# Altium PCB ACAMP.PcbDoc
Units mil, origin at the board's own origin, x right, y up, seen from the top; angles counter-clockwise.
Board outline 1968.5 x 1968.5 mil, 4 copper layers (Top Layer, Internal Plane 1, Signal Layer 1, Bottom Layer), stack 64.634 mil thick; 81 components, 107 nets, 352 pads, 9 vias.
Unrouted connection lines stored in the file: 184.
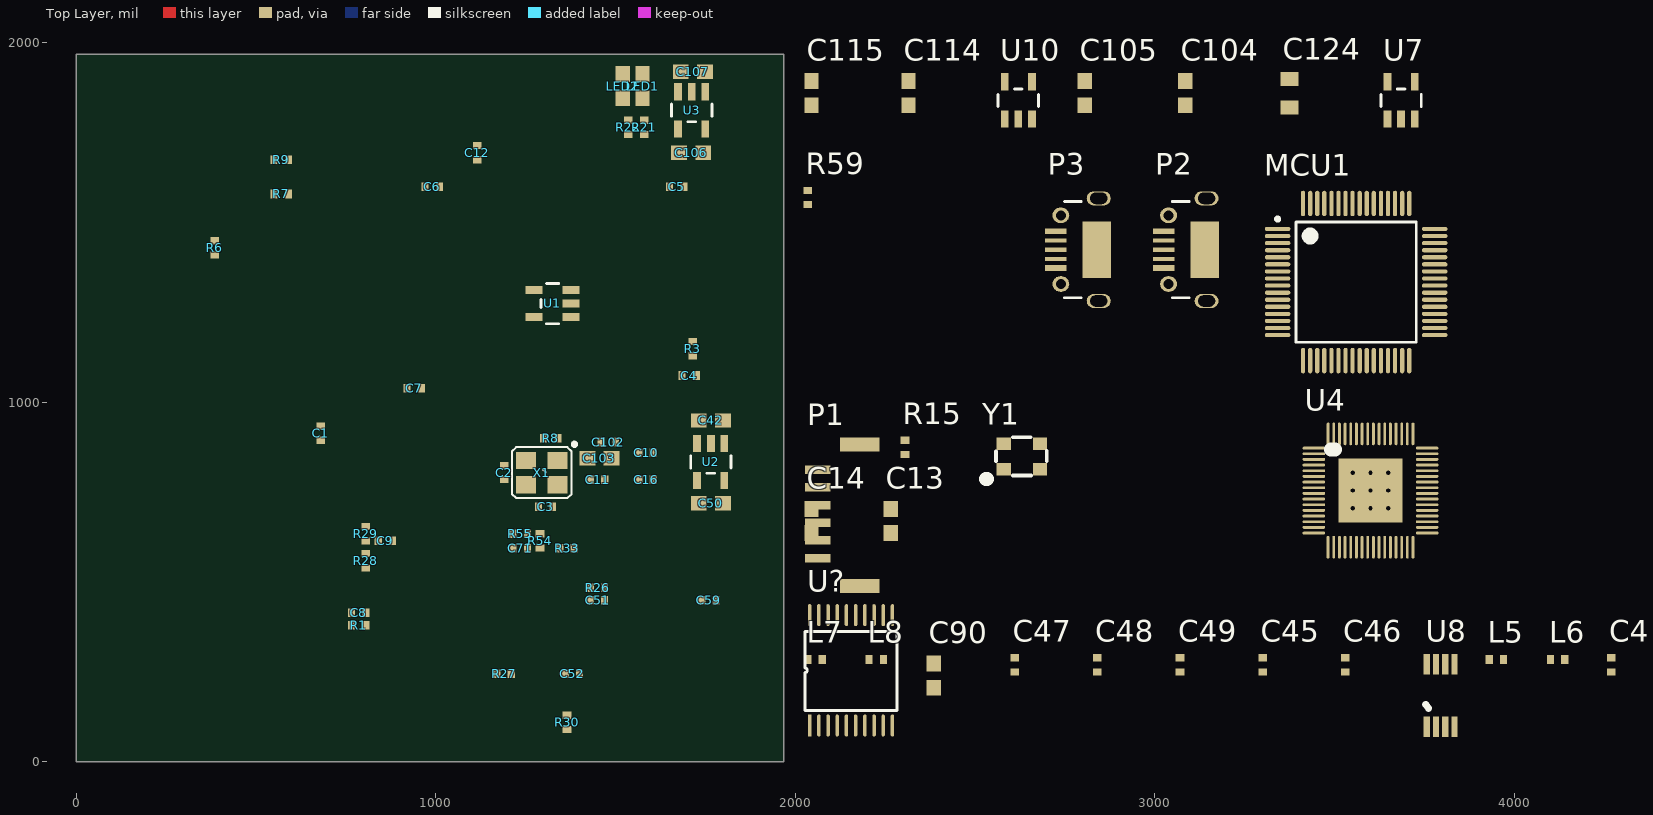
[diagram p0: Top Layer view]
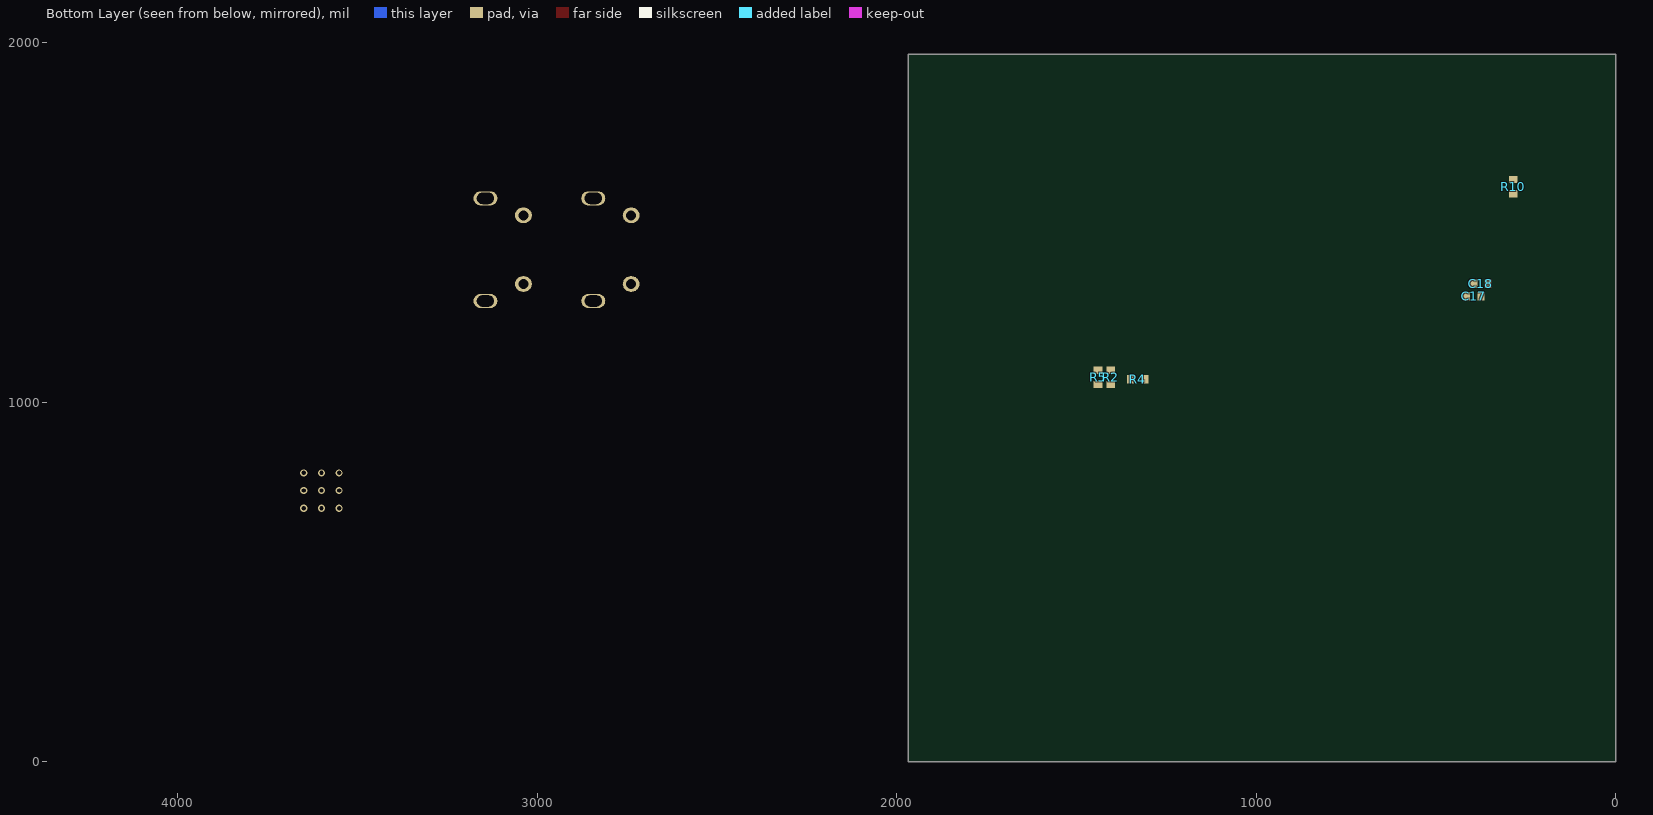
[diagram p1: Bottom Layer view, seen from below]
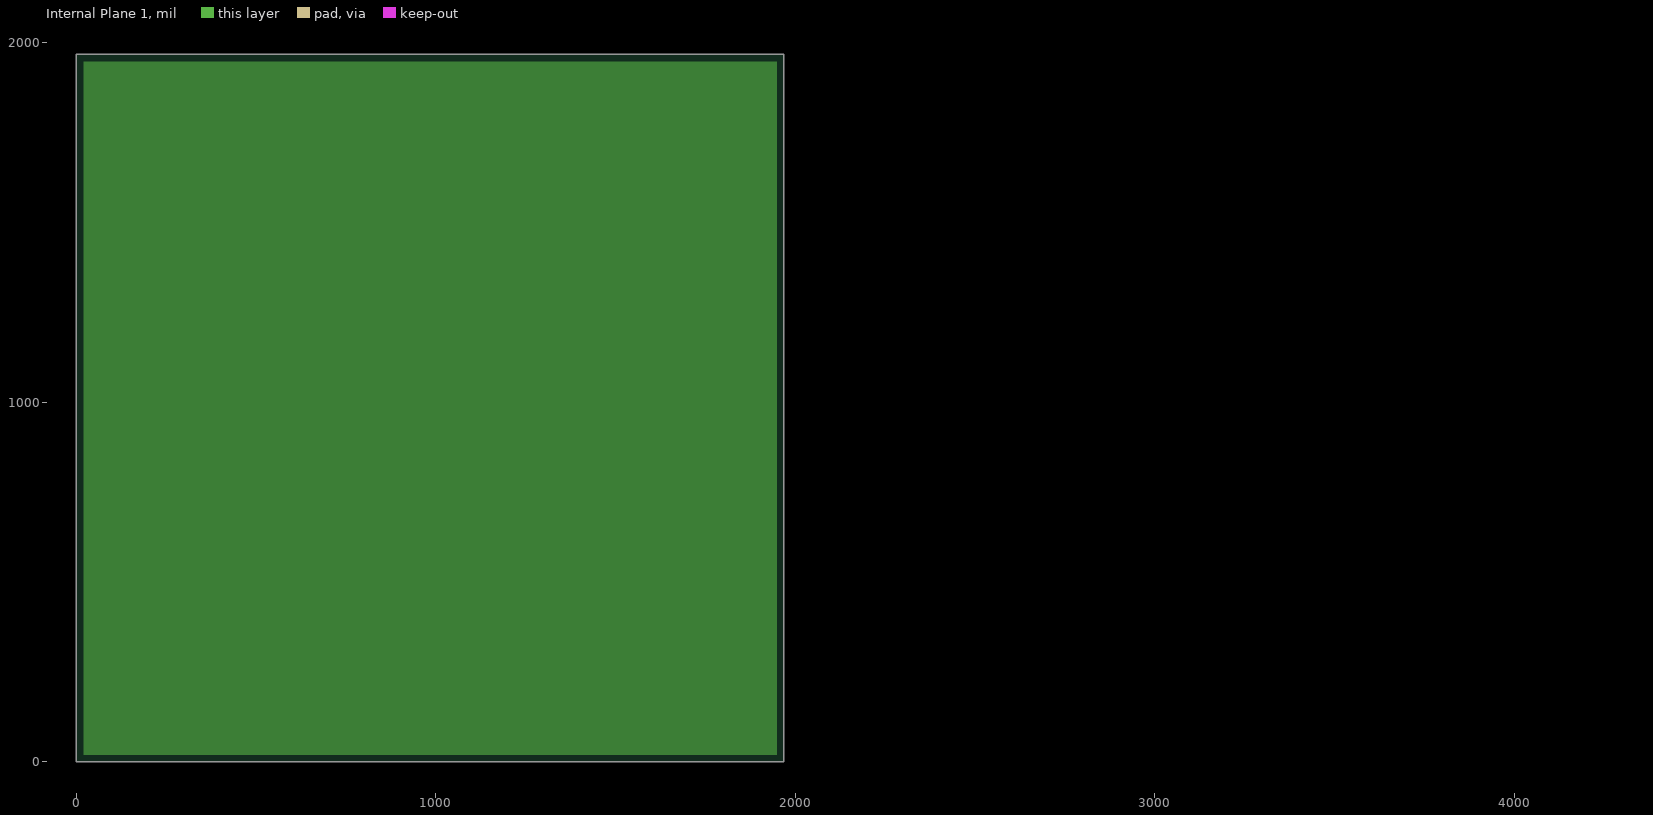
[diagram p2: Internal Plane 1, clearances drawn from the general rule]

## Layer stack, top to bottom
Top Solder: solder mask 0.4, Solder Resist, Dk 3.5
Top Layer: signal copper 1.4
Dielectric 1: core 6, FR-4, Dk 4.2
Internal Plane 1: plane copper 1.4169, net (Multiple Nets)
Dielectric 3: prepreg 47, Dk 4.2
Signal Layer 1: signal copper 1.4169
Dielectric 2: core 6, Dk 4.2
Bottom Layer: signal copper 1.4
Bottom Solder: solder mask 0.4, Solder Resist, Dk 3.5

## Board outline
0,0 1968.5,0 1968.5,1968.5 0,1968.5

## Design rules (kind name [scope] priority, off if disabled: settings)
Clearance [All] p1: gap=6
DiffPairsRouting [All] p1: maxlimit=10 minlimit=10 mostfreqgap=10 toplayer_minwidth=6 toplayer_maxwidth=15 toplayer_prefwidth=15 midlayer1_minwidth=6 midlayer1_maxwidth=15 midlayer1_prefwidth=15 bottomlayer_minwidth=6 bottomlayer_maxwidth=15 bottomlayer_prefwidth=15 maxuncoupledlength=500
MinimumSolderMaskSliver [All] p1 off: minsoldermaskwidth=10
PlaneClearance [All] p1: clearance=20
PlaneConnect [All] p1: planeconnectstyle=Direct reliefexpansion=20 reliefentries=4 reliefconductorwidth=10 reliefairgap=10
PolygonConnect [All] p1: connectstyle=Direct reliefconductorwidth=10 reliefentries=4 polygonreliefangle="90 Angle" airgapwidth=10
RoomDefinition power [InComponentClass('power')] p1: confinementstyle=ConfineIn formatcopy=TRUE lockcomponents=FALSE outline 2015,1755 3755,1755 3755,2030 2015,2030
RoomDefinition CPLD [InComponentClass('CPLD')] p2: confinementstyle=ConfineIn formatcopy=TRUE lockcomponents=FALSE outline 2015,460 2710,460 2710,1015 2015,1015
RoomDefinition ADC [InComponentClass('ADC')] p3: confinementstyle=ConfineIn formatcopy=TRUE lockcomponents=FALSE outline 2015,60 4440,60 4440,410 2015,410
RoomDefinition mcu [InComponentClass('mcu')] p4 off: confinementstyle=ConfineIn formatcopy=TRUE lockcomponents=FALSE outline 4090,1500 6900,1500 6900,3220 4090,3220
RoutingVias [All] p1: holewidth=12 width=20 viastyle="Through Hole" minholewidth=12 minwidth=20 maxholewidth=28 maxwidth=50
SilkToBoardRegionClearance [All] p1 off:
SilkToSilkClearance [All] p1 off: silktosilkclearance=10
SilkToSolderMaskClearance [IsPad] p1 off: minsilkscreentomaskgap=10 clearancetoexposedcopper=TRUE
SolderMaskExpansion [All] p1: expansion=4
UnpouredPolygon [All] p1: allowunpoured=FALSE
Width [All] p1: maxlimit=60 minlimit=6 preferedwidth=6
22 further rules are at their usual default settings.

## Classes and differential pairs
component class CPLD: C8 C9 C10 C11 C16 C17 C18 P1 R3 R6 R7 R9 R10 R15 U4 Y1
component class mcu: C2 C3 C4 C5 C6 C7 C10 C11 C102 C103 LED1 LED2 MCU1 P2 P3 R4 R5 R8 R21 R22 R59 X1
component class ADC: C1 C12 C44 C45 C46 C47 C48 C49 C51 C52 C59 C71 C90 L5 L6 L7 L8 R1 R2 R26 R27 R28 R29 R30 R33 R54 R55 U1 U8 U?
component class power: C42 C50 C104 C105 C106 C107 C114 C115 C124 U2 U3 U7 U10
differential pair USB: +USB_P -USB_N

## Components (designator, comment, footprint, x,y, rotation, side; value= is the part's Value field where it differs from the comment)
C1 "NC" 0402 680,915 r270 top
C2 "22pF" 0402 1190,805 r90 top
C3 "22pF" 0402 1305,710 r0 top
C4 "0.1uF * 6" 0402 1705,1075 r180 top
C5 "1n" 0402 1670,1600 r180 top
C6 "1n" 0402 990,1600 r0 top
C7 "1n" 0402 940,1040 r0 top
C8 "0.1uF" 0402 785,415 r0 top
C9 "0.1uF" 0402 860,615 r180 top
C10 "0.1uF" 0402 1585,860 r0 top
C11 "0.1uF" 0402 1450,785 r0 top
C12 "NC" 0402 1115,1695 r270 top
C13 "2.2uF" 0603 2265,670 r90 top
C14 "2.2uF" 0603 2045,670 r90 top
C16 "0.1uF" 0402 1585,785 r0 top
C17 "0.1uF" 0402 395,1295 r180 bottom
C18 "0.1uF" 0402 375,1330 r180 bottom
C42 "4.7uF" 0603 1765,950 r0 top
C44 "NC" 0402 4270,270 r90 top
C45 "NC" 0402 3300,270 r90 top
C46 "NC" 0402 3530,270 r90 top
C47 "NC" 0402 2610,270 r90 top
C48 "NC" 0402 2840,270 r90 top
C49 "NC" 0402 3070,270 r90 top
C50 "4.7uF" 0603 1765,720 r0 top
C51 "NC" 0402 1450,450 r180 top
C52 "NC" 0402 1380,245 r0 top
C59 "NC" 0402 1760,450 r180 top
C71 "0.1uF" 0402 1235,595 r180 top
C90 "1uF" 0603 2385,240 r90 top
C102 "1n" 0402 1480,890 r0 top
C103 "2.2uF" 0603 1455,845 r0 top
C104 "4.7uF" 0603 3085,1860 r90 top
C105 "4.7uF" 0603 2805,1860 r90 top
C106 "4.7uF" 0603 1710,1695 r0 top
C107 "4.7uF" 0603 1715,1920 r0 top
C114 "4.7uF" 0603 2315,1860 r90 top
C115 "4.7uF" 0603 2045,1860 r90 top
C124 "10uF, titanium" 0805 3375,1860 r90 top
L5 "0R" 0402 3950,285 r0 top
L6 "0R" 0402 4120,285 r0 top
L7 "0R" 0402 2055,285 r0 top
L8 "0R" 0402 2225,285 r0 top
LED1 "LED0" 0603 1575,1880 r270 top
LED2 "LED0" 0603 1520,1880 r270 top
MCU1 "STM32F103R8T6" LQFP64_N 3560,1335 r0 top
P1 "JTAG-6P" GH1.25-6 2120,690 r90 top
P2 "SWD_MicroUSB" MICRO-YZX 3255,1425 r90 top
P3 "SWD_MicroUSB" MICRO-YZX 2955,1425 r90 top
R1 "1.33k" 0402 785,380 r0 top
R2 "100k" 0402 1405,1070 r270 bottom
R3 "10k" 0402 1715,1150 r270 top
R4 "10k" 0402 1330,1065 r180 bottom
R5 "10k" 0402 1440,1070 r270 bottom
R6 "10k" 0402 385,1430 r90 top
R7 "10k" 0402 570,1580 r0 top
R8 "" 0402 1320,900 r180 top
R9 "10k" 0402 570,1675 r0 top
R10 "1k" 0402 285,1600 r90 bottom
R15 "10k" 0402 2305,875 r90 top
R21 "10k" 0402 1580,1765 r90 top
R22 "10k" 0402 1535,1765 r90 top
R26 "1.33k" 0402 1450,485 r180 top
R27 "100k" 0402 1190,245 r0 top
R28 "931R" 0402 805,560 r270 top
R29 "1.33k" 0402 805,635 r270 top
R30 "931R" 0402 1365,110 r90 top
R33 "1.33k" 0402 1365,595 r0 top
R54 "5k" 0402 1290,615 r90 top
R55 "5k" 0402 1235,635 r180 top
R59 "FB" 0402 2035,1570 r90 top
U1 "OP-SOT23" SOT23-5 1325,1275 r90 top
U2 "LP5907" SOT23-5 1765,835 r180 top
U3 "RT9193/RT9013/LP5907" SOT23-5 1712,1813 r180 top
U4 "5M160ZE64" 5M160ZE64 3600,755 r0 top
U7 "LP5907" SOT23-5 3685,1840 r0 top
U8 "DiffAmp" MSOP8/VSSOP8 3795,185 r90 top
U10 "LP5907" SOT23-5 2620,1840 r0 top
U? "AD9283" SSOP20 2155,255 r90 top
X1 "8mhz" OSCILLATOR-3.2X2.5 1295,805 r180 top
Y1 "OSC_50M" TXC_7Q 2630,850 r0 top

## Footprints (in the part's own frame and the unit in brackets; to place one, negate y for a bottom-side part, rotate by r counter-clockwise, add the part's x,y. Pads: shape width x height; smd on the part's side, far side on the other; paste and mask are expansions set on the pad)
5M160ZE64 [mm]
  rect 4.5x4.5 smd: 0(0,0)
  oval 1.6x0.2 smd: 1(-4,3) 2(-4,2.6) 3(-4,2.2) 4(-4,1.8) 5(-4,1.4) 6(-4,1) 7(-4,0.6) 8(-4,0.2) 9(-4,-0.2) 10(-4,-0.6) 11(-4,-1) 12(-4,-1.4) 13(-4,-1.8) 14(-4,-2.2) 15(-4,-2.6) 16(-4,-3) 33(4,-3) 34(4,-2.6) 35(4,-2.2) 36(4,-1.8) 37(4,-1.4) 38(4,-1) 39(4,-0.6) 40(4,-0.2) 41(4,0.2) 42(4,0.6) 43(4,1) 44(4,1.4) 45(4,1.8) 46(4,2.2) 47(4,2.6) 48(4,3)
  oval 0.2x1.6 smd: 17(-3,-4) 18(-2.6,-4) 19(-2.2,-4) 20(-1.8,-4) 21(-1.4,-4) 22(-1,-4) 23(-0.6,-4) 24(-0.2,-4) 25(0.2,-4) 26(0.6,-4) 27(1,-4) 28(1.4,-4) 29(1.8,-4) 30(2.2,-4) 31(2.6,-4) 32(3,-4) 49(3,4) 50(2.6,4) 51(2.2,4) 52(1.8,4) 53(1.4,4) 54(1,4) 55(0.6,4) 56(0.2,4) 57(-0.2,4) 58(-0.6,4) 59(-1,4) 60(-1.4,4) 61(-1.8,4) 62(-2.2,4) 63(-2.6,4) 64(-3,4)
  silkscreen extent -2.8,2.9 -2.5,2.9, body extent -3.5,-3.5 3.5,3.5, height 1
0402 [mil] "0402-RES"
  rect 20x24 smd: 1(-19.68,0) 2(20,0)
0603 [mil] "0603-RES"
  rect 44x40 smd: 1(-33.46,0) 2(34,0)
0805 [mil]
  rect 39.37x50 smd: 1(-40,0) 2(40,0)
  body extent -50,-30 50,30, height 31
GH1.25-6 [mm]
  rect 1x2.8 smd: 0(-5.1,-1.5) 0(4.9,-1.5)
  rect 0.6x1.8 smd: 1(-3.125,1.45) 2(-1.875,1.45) 3(-0.625,1.45) 4(0.625,1.45) 5(1.875,1.45) 6(3.125,1.45)
  body extent -5.48,-3.1 5.27,1.75, height 4.25
LQFP64_N [mm]
  oval 1.8x0.3 smd: 1(-5.55,3.75) 2(-5.55,3.25) 3(-5.55,2.75) 4(-5.55,2.25) 5(-5.55,1.75) 6(-5.55,1.25) 7(-5.55,0.75) 8(-5.55,0.25) 9(-5.55,-0.25) 10(-5.55,-0.75) 11(-5.55,-1.25) 12(-5.55,-1.75) 13(-5.55,-2.25) 14(-5.55,-2.75) 15(-5.55,-3.25) 16(-5.55,-3.75) 33(5.55,-3.75) 34(5.55,-3.25) 35(5.55,-2.75) 36(5.55,-2.25) 37(5.55,-1.75) 38(5.55,-1.25) 39(5.55,-0.75) 40(5.55,-0.25) 41(5.55,0.25) 42(5.55,0.75) 43(5.55,1.25) 44(5.55,1.75) 45(5.55,2.25) 46(5.55,2.75) 47(5.55,3.25) 48(5.55,3.75)
  oval 0.3x1.8 smd: 17(-3.75,-5.55) 18(-3.25,-5.55) 19(-2.75,-5.55) 20(-2.25,-5.55) 21(-1.75,-5.55) 22(-1.25,-5.55) 23(-0.75,-5.55) 24(-0.25,-5.55) 25(0.25,-5.55) 26(0.75,-5.55) 27(1.25,-5.55) 28(1.75,-5.55) 29(2.25,-5.55) 30(2.75,-5.55) 31(3.25,-5.55) 32(3.75,-5.55) 49(3.75,5.55) 50(3.25,5.55) 51(2.75,5.55) 52(2.25,5.55) 53(1.75,5.55) 54(1.25,5.55) 55(0.75,5.55) 56(0.25,5.55) 57(-0.25,5.55) 58(-0.75,5.55) 59(-1.25,5.55) 60(-1.75,5.55) 61(-2.25,5.55) 62(-2.75,5.55) 63(-3.25,5.55) 64(-3.75,5.55)
  silkscreen extent -5.67,-4.25 4.25,4.57
MICRO-YZX [mm]
  rect 0.4x1.5 smd: 1(-1.3,5.85) 5(1.3,5.85)
  rect 0.3x1.5 smd: 2(-0.65,5.85) 3(0,5.85) 4(0.65,5.85)
  oval 1x1.7 hole 0.8 slot 1.2 at 90 deg: 5(-3.625,2.82) 5(3.625,2.82)
  oval 1.1x1.2 hole 0.7: 5(-2.425,5.5) 5(2.425,5.5)
  rect 4x2 smd: 5(0,2.95)
  silkscreen extent -3.4,4.05 3.4,5.25, body extent -4.02,0.33 3.98,5.93, height 2.6
MSOP8/VSSOP8 [mm]
  rect 1.45x0.45 smd: 1(-2.2,0.975) 2(-2.2,0.325) 3(-2.2,-0.325) 4(-2.2,-0.975) 5(2.2,-0.975) 6(2.2,-0.325) 7(2.2,0.325) 8(2.2,0.975)
  silkscreen extent -0.9,0.85 -0.65,1.05
OSCILLATOR-3.2X2.5 [mil] "OSCILLATOR-3.2X2.5"
  rect 56x48 smd: 1(-43.31,-33.46) 2(44,-33.46) 3(44,34) 4(-43.31,34)
  silkscreen extent -95,-83 83,71
SOT23-5 [mil] "SOT23-5"
  rect 22x48 smd: 1(-37.4,-51.19) 2(0,-51.19) 3(38,-51.19) 4(38,52) 5(-37.4,52)
  silkscreen extent -56,-17 56,32
SSOP20 [mm]
  rect 1.55x0.25 smd: 1(-3.9,2.925)
  oval 1.55x0.25 smd: 2(-3.9,2.275) 3(-3.9,1.625) 4(-3.9,0.975) 5(-3.9,0.325) 6(-3.9,-0.325) 7(-3.9,-0.975) 8(-3.9,-1.625) 9(-3.9,-2.275) 10(-3.9,-2.925) 11(3.9,-2.925) 12(3.9,-2.275) 13(3.9,-1.625) 14(3.9,-0.975) 15(3.9,-0.325) 16(3.9,0.325) 17(3.9,0.975) 18(3.9,1.625) 19(3.9,2.275) 20(3.9,2.925)
  silkscreen extent -2.85,-3.25 2.75,3.25
TXC_7Q [mm]
  rect 1x0.9 smd: 1(-1.275,-0.9) 2(1.275,-0.9) 3(1.275,0.9) 4(-1.275,0.9)
  silkscreen extent -2.52,-1.6 1.78,1.35

## Part data
C1 C8 C9 C10 C11 C12 C16 C17 C18 C42 C44 C45 C46 C47 C48 C49 C50 C51 C52 C59 C104 C105 C106 C107 C114 C115 C124: library part Cap, "Capacitor"
C2 C3 C4 C5 C6 C7 C13 C14 C71 C90 C102 C103: library part CAP0402-CAP, "<b>Capacitor</b> / Standard 0603 ceramic capacitor, and 0.1\" leaded capacitor."
L5 L6 L7 L8: library part L/2.5*2.0
LED1 LED2: "Typical INFRARED GaAs LED"
MCU1: "STM32 ARM-based 32-bit MCU with 64 Kbytes Flash, 64-pin LQFP, Industrial Temperature"
P2 P3: "Connector SMD USB Micro Type B middle mount"
R1 R2 R3 R4 R5 R6 R7 R8 R9 R10 R15 R21 R22 R26 R27 R28 R29 R30 R33 R54 R55 R59: library part Res2, "Resistor"
U3: library part LP5907
X1: library part OSCILLATOR-3.2X2.5, "Crystal Oscillator in 3.2x2.5 SMD"

## Via types
v1: diameter 19.68, hole 11.81, Top Layer to Bottom Layer, 9 vias

## Nets (pads, with @x,y where several pads share a name; then routed paths per layer and width w, separated by ;. In a path a pad name is that pad's centre, name@x,y a point inside that pad or via, vN(x,y) a via of type N, cw(c..) or ccw(c..) an arc to the next point about the centre after c; other vN are vias at no path point)
1.8: C8.2 U4.8 U4.41
3.3A: C50.2 C102.2 C103.2 MCU1.13 R54.1 U1.5 U2.5
3.3D: C4.2 C5.2 C6.2 C7.2 C9.2 C16.2 C17.2 C18.2 C106.2 LED1.1 LED2.1 MCU1.1 MCU1.19 MCU1.32 MCU1.48 MCU1.64 P1.4 R3.2 R4.2 R6.2 R7.2 R9.2 R15.2 U3.5 U4.6 U4.23 U4.39 U4.57 Y1.4
3.3LNA: C114.2 U10.5
3.3RF: C104.2 C124.2 U7.5
5V: C42.2 C105.2 C107.2 C115.2 P2.1 P3.1 U2.1 U2.3 U3.1 U3.3 U7.1 U7.3 U10.1 U10.3
AGND: C71.2 C90.2 C102.1 C103.1 MCU1.12 R55.2 R59.2 U1.2 U8.6
CLK0: U4.7 Y1.3
GND: C2.2 C3.2 C4.1 C5.1 C6.1 C7.1 C8.1 C9.1 C10.2 C11.2 C16.1 C17.1 C18.1 C42.1 C50.1 C104.1 C105.1 C106.1 C107.1 C114.1 C115.1 C124.1 MCU1.18 MCU1.63 P1.0 P1.6 P2.5 P3.5 R5.1 R10.1 R59.1 U2.2 U3.2 U4.0 U7.2 U10.2 X1.2 X1.4 Y1.2
  other v1: 3550.79,705.79 3600,705.79 3649.21,705.79 3550.79,755 3600,755 3649.21,755 3550.79,804.21 3600,804.21 3649.21,804.21
NetC1_1: C1.1 R1.2 R27.2
NetC2_1: C2.1 MCU1.5 R8.2 X1.3
NetC3_1: C3.1 MCU1.6 R8.1 X1.1
NetC12_1: C12.1 R2.1 R29.2
NetC13_1: C10.1 MCU1.31
NetC14_1: C11.1 MCU1.47
NetC44_1: C44.1 C45.2 C47.2 L5.1 R26.1 U8.4
NetC44_2: C44.2 R28.1 U8.1
NetC45_1: C45.1 C46.2 C48.2 L5.2 L6.1
NetC46_1: C46.1 C49.2 L6.2
NetC47_1: C47.1 C51.1 C59.1 L7.2 R33.1 U8.5
NetC48_1: C48.1 C51.2 C52.1 L7.1 L8.2
NetC49_1: C49.1 C52.2 L8.1
NetC59_2: C59.2 R30.1 U8.8
NetC71_1: C71.1 R54.2 R55.1 U1.1
NetLED1_2: LED1.2 R21.2
NetLED2_2: LED2.2 R22.2
NetMCU1_2: MCU1.2
NetMCU1_3: MCU1.3
NetMCU1_4: MCU1.4
NetMCU1_7: MCU1.7 R4.1
NetMCU1_37: MCU1.37 R21.1
NetMCU1_38: MCU1.38 R22.1
NetMCU1_42: MCU1.42
NetMCU1_46: MCU1.46 P3.3
NetMCU1_49: MCU1.49 P3.2
NetMCU1_60: MCU1.60 R5.2
NetP3_4: P3.4
NetR1_1: R1.1 R26.2 R28.2
NetR3_1: R3.1 Y1.1
NetR29_1: R29.1 R30.2 R33.2
PC8: MCU1.39
PC9: MCU1.40
PC10: MCU1.51
PC11: MCU1.52
PC12: MCU1.53
PD2: MCU1.54
PIN1: U4.1
PIN2: U4.2
PIN3: U4.3
PIN4: U4.4
PIN5: U4.5
PIN9: U4.9
PIN10: U4.10
PIN11: U4.11
PIN12: U4.12
PIN13: U4.13
PIN18: U4.18
PIN19: U4.19
PIN20: U4.20
PIN21: U4.21
PIN22: U4.22
PIN23: U4.24
PIN25: U4.25
PIN26: U4.26
PIN27: U4.27
PIN28: R7.1 U4.28
PIN29: R15.1 U4.29
PIN30: U4.30
PIN31: U4.31
PIN32: U4.32
PIN33: U4.33
PIN34: U4.34
PIN35: U4.35
PIN36: U4.36
PIN37: U4.37
PIN38: U4.38
PIN40: U4.40
PIN42: U4.42
PIN43: U4.43
PIN44: U4.44
PIN45: U4.45
PIN46: U4.46
PIN47: U4.47
PIN48: U4.48
PIN49: U4.49
PIN50: U4.50
PIN51: U4.51
PIN52: U4.52
PIN53: U4.53
PIN54: U4.54
PIN55: U4.55
PIN56: U4.56
PIN58: MCU1.21 U4.58
PIN59: MCU1.22 U4.59
PIN60: MCU1.23 U4.60
PIN61: U4.61
PIN62: U4.62
PIN63: U4.63
PIN64: U4.64
TCK: P1.3 R10.2 U4.16
TDI: P1.2 R9.1 U4.15
TDO: P1.1 U4.17
TMS: P1.5 R6.1 U4.14
USB_N: MCU1.44 P2.2
USB_P: MCU1.45 P2.3
VAMP: C90.1 U8.3 U8.7
VREF: R2.2 R27.1 U1.3 U1.4 U8.2
pads on no net: C1.2 C12.2 C13.1 C13.2 C14.1 C14.2 MCU1.8 MCU1.9 MCU1.10 MCU1.11 MCU1.14 MCU1.15 MCU1.16 MCU1.17 MCU1.20 MCU1.24 MCU1.25 MCU1.26 MCU1.27 MCU1.28 MCU1.29 MCU1.30 MCU1.33 MCU1.34 MCU1.35 MCU1.36 MCU1.41 MCU1.43 MCU1.50 MCU1.55 MCU1.56 MCU1.57 MCU1.58 MCU1.59 MCU1.61 MCU1.62 P2.4 U2.4 U3.4 U7.4 U10.4 U?.1 U?.2 U?.3 U?.4 U?.5 U?.6 U?.7 U?.8 U?.9 U?.10 U?.11 U?.12 U?.13 U?.14 U?.15 U?.16 U?.17 U?.18 U?.19 U?.20

## Polygon pours and split planes (outlines as drawn)
GND on Internal Plane 1 (split plane): 1948.41,20.1 20.1,20.1 20.1,1948.41 1948.41,1948.41